# EAGLE board dual-channel-buck-v0 (EAGLE 5.07)
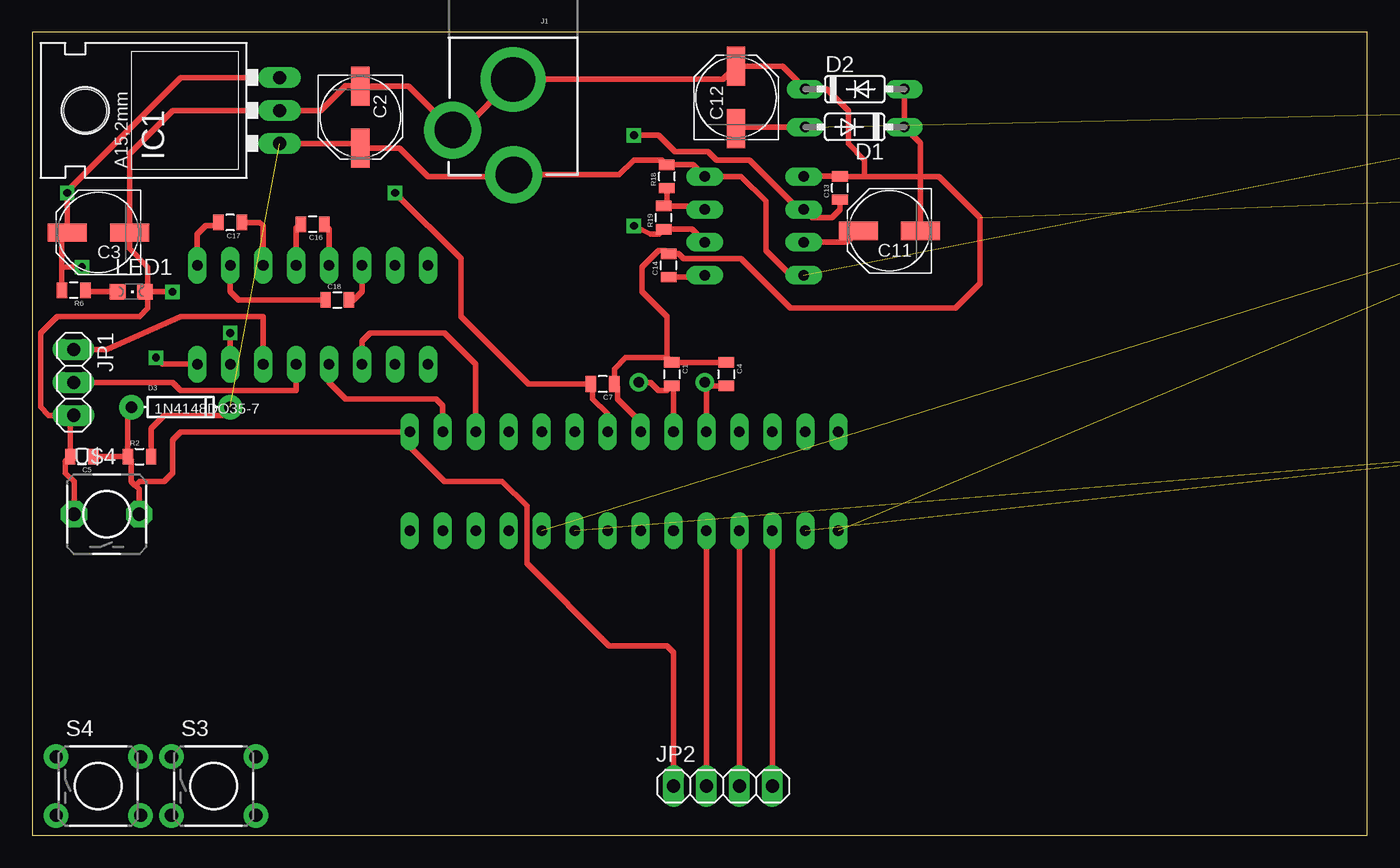
[diagram p0: board, top side]
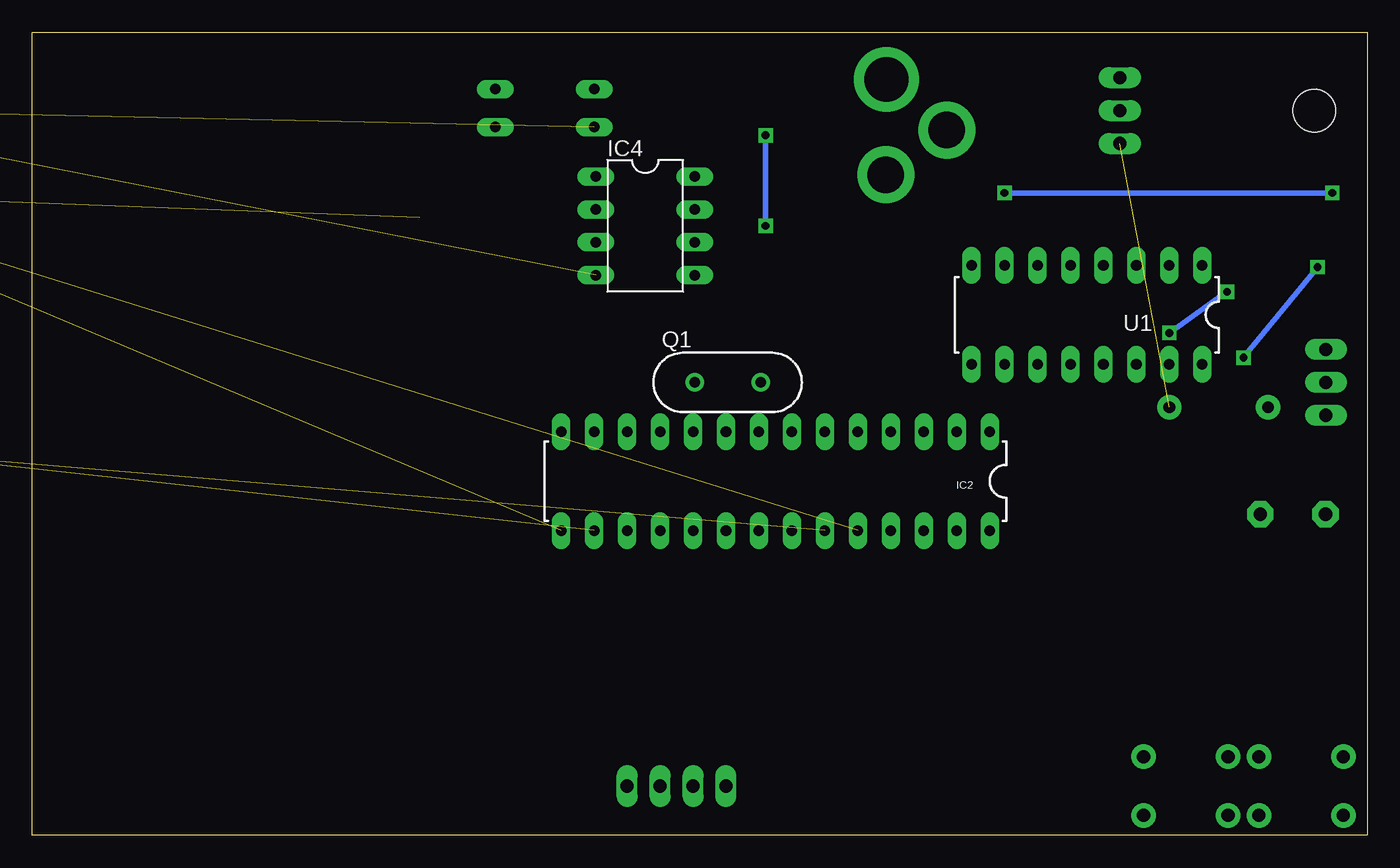
[diagram p1: board, bottom side, seen from below]

Size 102.85 x 61.9 mm. Coordinates in mm from the lower left corner, seen from the top.
Outline: 0,0 102.85,0 102.85,61.9 0,61.9 0,0
Copper layers (1*16): Top 0.035mm / dielectric 1.5mm / Bottom 0.035mm
Design rules "SparkFun-diy": minimum track width 8mil, minimum drill 20mil, track to track 10mil, track to pad 10mil, pad to pad 10mil, via to via 10mil, smd to smd 10mil, copper to edge 10mil, drill to drill 8mil, minimum pad ring 12mil, minimum via ring 10mil, stop-mask expansion 4mil, vias tented up to drill 25mil, thermal gap 10mil

## Footprints (pad centres in the part's own frame; a part is rotated, then mirrored left to right if it is on the bottom)
0805 = smd 0.8 x 1.2: 1 -0.9,0; 2 0.9,0
PANASONIC_D = smd 3 x 1.4: + 2.4,0; - -2.4,0
CPOL-RADIAL-100UF-25V = drill 0.7 pad 1.651 square: 1 1.27,0 | drill 0.7 pad 1.651 round: 2 -1.27,0
DO35-7 = drill 0.813 long: A 3.81,0; C -3.81,0
DIODE-1N4148 = drill 0.9 pad 1.88 round: A -3.81,0; C 3.81,0
DO41-7.6 = drill 1.1 pad 1.7 round: A 3.81,0; C -3.81,0
78XXL = drill 1.016 long: GND 0,-3.81; IN -2.54,-3.81; OUT 2.54,-3.81 | hole 3.302: 0,11.176
DIL28-3 = drill 0.813 long: 1 -16.51,-3.81; 2 -13.97,-3.81; 3 -11.43,-3.81; 4 -8.89,-3.81; 5 -6.35,-3.81; 6 -3.81,-3.81; 7 -1.27,-3.81; 8 1.27,-3.81; 9 3.81,-3.81; 10 6.35,-3.81; 11 8.89,-3.81; 12 11.43,-3.81; 13 13.97,-3.81; 14 16.51,-3.81; 15 16.51,3.81; 16 13.97,3.81; 17 11.43,3.81; 18 8.89,3.81; 19 6.35,3.81; 20 3.81,3.81; 21 1.27,3.81; 22 -1.27,3.81; 23 -3.81,3.81; 24 -6.35,3.81; 25 -8.89,3.81; 26 -11.43,3.81; 27 -13.97,3.81; 28 -16.51,3.81
DIL-08 = drill 0.813 long: 1 -3.81,-3.81; 2 -1.27,-3.81; 3 1.27,-3.81; 4 3.81,-3.81; 5 3.81,3.81; 6 1.27,3.81; 7 -1.27,3.81; 8 -3.81,3.81
DIL08 = drill 0.813 pad 1.27 round: 1 -3.81,-3.81; 2 -1.27,-3.81; 3 1.27,-3.81; 4 3.81,-3.81; 5 3.81,3.81; 6 1.27,3.81; 7 -1.27,3.81; 8 -3.81,3.81
POWER_JACK_2.1X5.5_BIG_PTH = drill 3.4 pad 5 round: GND -0.053,7.35 | drill 2.8 pad 4.4 round: GNDBREAK -4.7,3.451; PWR 0,0
1X03 = drill 1.016 long: 1 -2.54,0; 2 0,0; 3 2.54,0
1X04 = drill 1.016 long: 1 -3.81,0; 2 -1.27,0; 3 1.27,0; 4 3.81,0
ED16 = drill 1.016 long: 1 -8.255,0; 2 -3.81,0
CHIPLED_0805 = smd 1.2 x 1.2: A 0,-1.05; C 0,1.05
2,54/1,1 = drill 1.118 pad 2.54 octagon: 1 0,0
HC49US = drill 0.813 round: 1 -2.54,0; 2 2.54,0
TO220BH = drill 1.118 long: D 0,-6.35; G -2.54,-6.35; S 2.54,-6.35 | hole 3.302: 0,11.176
TO220 = drill 1.118 long: 1 -2.54,-6.35; 2 0,-6.35; 3 2.54,-6.35 | hole 3.302: 0,11.176
AXIAL-0.3 = drill 0.9 pad 1.88 round: P$1 -3.81,0; P$2 3.81,0
0414/15 = drill 1.016 octagon: 1 -7.62,0; 2 7.62,0
TACTILE-PTH = drill 1.016 pad 1.88 round: 1 -3.251,2.261; 2 3.251,2.261; 3 -3.251,-2.261; 4 3.251,-2.261
SOT23-EBC = smd 1 x 1.4: B 0.95,-1.1; C 0,1.1; E -0.95,-1.1
DIL16 = drill 0.813 long: 1 -8.89,-3.81; 2 -6.35,-3.81; 3 -3.81,-3.81; 4 -1.27,-3.81; 5 1.27,-3.81; 6 3.81,-3.81; 7 6.35,-3.81; 8 8.89,-3.81; 9 8.89,3.81; 10 6.35,3.81; 11 3.81,3.81; 12 1.27,3.81; 13 -1.27,3.81; 14 -3.81,3.81; 15 -6.35,3.81; 16 -8.89,3.81
ALPS-SKHV = drill 1.016 pad 2.032 octagon: 2 -2.51,0; 3 2.51,0

## Placement (x,y rotation side)
C1  22  [0805]  49.28,35.56 270 top
C2  100uf  [PANASONIC_D]  25.27,55.37 270 top
C3  10uf  [PANASONIC_D]  5.08,46.48 180 top
C4  22  [0805]  53.47,35.56 270 top
C5  100n  [0805]  3.81,29.21 180 top
C7  0.1  [0805]  43.94,34.8 180 top
C11  100uf  [PANASONIC_D]  66.04,46.61 180 top
C12  100uf  [PANASONIC_D]  54.23,56.9 90 top
C13  0.01  [0805]  62.23,49.91 90 top
C14  0.01  [0805]  49.02,43.94 90 top
C15  470uf  [CPOL-RADIAL-100UF-25V]  182.88,61.59 0 top  (outside the outline)
C16  0.1  [0805]  21.59,47.12 180 top
C17  0.1  [0805]  15.24,47.24 180 top
C18  0.1  [0805]  23.5,41.27 0 top
C19  0.01  [0805]  204.47,37.47 0 top  (outside the outline)
C20  [0805]  201.29,31.75 0 top  (outside the outline)
C21  [0805]  205.1,31.75 0 top  (outside the outline)
C22  [0805]  208.91,31.75 0 top  (outside the outline)
D1  1N4148DO35-7  [DO35-7]  63.37,54.61 180 top
D2  1N4148DO35-7  [DO35-7]  63.37,57.53 0 top
D3  1N4148DO35-7  [DIODE-1N4148]  11.43,33.02 0 top
D5  1N5819-B  [DO41-7.6]  192.41,61.59 0 top  (outside the outline)
D6  1N5819-B  [DO41-7.6]  170.18,51.44 0 top  (outside the outline)
IC1  7805  [78XXL]  15.24,55.88 90 top
IC2  AVR-MEGA8-PPTH  [DIL28-3]  45.59,27.3 180 bottom
IC4  NE555  [DIL-08]  55.63,46.99 270 bottom
IC5  TL062P  [DIL08]  172.72,60.96 0 top  (outside the outline)
J1  POWER_JACKPTH_BIG  [POWER_JACK_2.1X5.5_BIG_PTH]  37.08,50.93 0 top
JP1  [1X03]  3.17,34.92 270 top
JP2  [1X04]  53.21,3.81 0 top
L1  [ED16]  200.03,80.01 0 top  (outside the outline)
LED1  RED  [CHIPLED_0805]  7.62,41.91 270 top
LED2  RED  [CHIPLED_0805]  187.32,43.18 0 top  (outside the outline)
PAD1  [2,54/1,1]  207.01,43.81 0 top  (outside the outline)
PAD2  [2,54/1,1]  167.64,35.56 0 top  (outside the outline)
Q1  [HC49US]  49.28,34.92 0 bottom
Q4  [TO220BH]  184.15,74.93 0 top  (outside the outline)
Q5  IRF540  [TO220]  171.45,74.93 0 top  (outside the outline)
R2  10k  [0805]  8.26,29.21 0 top
R6  680  [0805]  3.17,42.04 180 top
R18  1k  [0805]  48.9,50.8 90 top
R19  75k  [0805]  48.64,47.62 90 top
R20  1k  [0805]  208.28,37.47 0 top  (outside the outline)
R21  6.8  [0805]  167,31.75 0 top  (outside the outline)
R22  10k  [AXIAL-0.3]  177.16,36.83 0 top  (outside the outline)
R23  10k  [AXIAL-0.3]  187.32,36.83 0 top  (outside the outline)
R24  1k  [0805]  170.81,31.75 0 top  (outside the outline)
R25  0.1R  [0414/15]  187.96,50.8 0 top  (outside the outline)
R26  1k  [AXIAL-0.3]  197.49,36.83 0 top  (outside the outline)
R27  1k  [0805]  174.62,31.75 0 top  (outside the outline)
R28  1k  [0805]  178.44,31.75 0 top  (outside the outline)
R29  10k  [0805]  182.25,31.75 0 top  (outside the outline)
R30  1k  [0805]  186.06,31.75 0 top  (outside the outline)
R31  1k  [0805]  189.87,31.75 0 top  (outside the outline)
R32  1k  [0805]  193.68,31.75 0 top  (outside the outline)
R33  10k  [0805]  197.49,31.75 0 top  (outside the outline)
R34  1R/5W  [0414/15]  174.62,41.91 0 top  (outside the outline)
S3  [TACTILE-PTH]  13.97,3.81 0 top
S4  [TACTILE-PTH]  5.08,3.81 0 top
T1  [SOT23-EBC]  193.68,43.18 0 top  (outside the outline)
T2  [SOT23-EBC]  198.12,43.18 0 top  (outside the outline)
T3  [SOT23-EBC]  202.56,43.18 0 top  (outside the outline)
U1  MAX232PTH  [DIL16]  21.59,40.13 180 bottom
U$4  TACT_SWITCH-2-PTH  [ALPS-SKHV]  5.71,24.77 0 top

## Library data of the parts
C1 C2 C4 C7 C11-C22 IC1 IC2 Q1 R6 R18-R24 R26-R33 S3 S4 U1 = SparkFun
C3 C5 D3 J1 L1 LED1 LED2 R2 T1-T3 U$4 = digital-toy
D1 D2 D5 D6 = diode
IC4 = st-microelectronics
IC5 = linear
JP1 JP2 = pinhead
PAD1 PAD2 = wirepad
Q4 = transistor-power
Q5 = transistor-fet
R25 R34 = rcl

## Nets
5V: C3.+ C7.2 IC1.OUT IC2.7 R6.2 U1.16
-VCC: C12.- D1.A IC5.4
CUR: C20.1 IC5.3 PAD2.1 R25.2
GND: C1.1 C2.- C3.- C4.1 C5.2 C7.1 C12.+ C13.2 C14.2 C15.2 C19.2 C20.2 C21.2 C22.2 D2.C D6.A IC1.GND IC2.8 IC4.1 J1.GND J1.GNDBREAK JP1.3 LED1.C Q5.3 R20.1 R23.P$1 R25.1 R27.2 R30.2 R31.2 R33.1 T2.C T3.E U1.15 U$4.2
I_ADC: C22.1 IC2.23 R26.P$2
MISO: IC2.18 JP2.3
MOSI: IC2.17 JP2.4
N$2: C1.2 IC2.9 Q1.2
N$3: C4.2 IC2.10 Q1.1
N$10: LED1.A R6.1
N$11: IC4.7 R18.1 R19.2
N$12: C13.1 IC4.2 IC4.6 R19.1
N$13: R22.P$1 R23.P$2 T3.B
N$14: C14.1 IC4.5
N$19: C11.+ IC4.3
N$23: C11.- D1.C D2.A
N$24: C17.2 U1.1
N$25: C17.1 U1.3
N$26: R24.1 T1.B T2.B T3.C
N$27: R21.2 T1.E T2.E
N$28: C16.2 U1.4
N$29: C16.1 U1.5
N$30: C18.1 U1.2
N$31: C18.2 U1.6
N$32: JP1.1 U1.14
N$33: JP1.2 U1.13
N$34: LED2.C R20.2
N$35: Q4.G R21.1
N$36: C15.1 C19.1 D5.A L1.1 LED2.A
N$37: D6.C L1.2 Q4.D
N$38: D5.C PAD1.1 R29.2 R34.1
N$39: IC5.2 R27.1 R28.1
N$40: IC5.1 R26.P$1 R28.2
N$41: IC5.6 R30.1 R32.2
N$42: Q5.2 R34.2
PWM: IC2.16 R22.P$2
PWM_DIS: IC2.15 Q5.1 R33.2
RS232_RX: IC2.2 U1.12
RS232_TX: IC2.3 U1.11
RST: C5.1 D3.A IC2.1 JP2.1 R2.1 U$4.3
SCK: IC2.19 JP2.2
V_ADC: IC2.24 IC5.7 R32.1
VCC: C2.+ D3.C IC1.IN IC4.4 IC4.8 IC5.8 J1.PWR Q4.S R2.2 R18.2 R24.2 T1.C
VOLTAGE: C21.1 IC5.5 R29.1 R31.1

## Tracks (layer width: path | path; a pad name or v marks a point on that pad's centre or on a via)
5V  (via drill 0.6)
  Top 0.406: IC1.OUT 11.43,58.42 2.68,49.67 v2.68,49.53 C3.+ 2.27,46.08 2.27,43.81 | R6.2 2.27,43.81 | IC2.7 44.32,32.51 43.18,33.66 43.18,34.66 C7.2 38.23,34.8 33.02,40.01 33.02,44.45 v27.94,49.53 | U1.16 10.03,36.32 v9.53,36.83 | 2.27,43.81 v3.81,43.81
  Bottom 0.406: v3.81,43.81 v9.53,36.83 | v2.68,49.53 v27.94,49.53
-VCC  (1 unrouted)
  Top 0.406: D1.A 54.34,54.61 C12.-
CUR  (3 unrouted)
GND  (via drill 0.6)  (16 unrouted)
  Top 0.406: LED1.C 8.89,42.13 8.89,43.81 7.48,45.23 C3.- 7.48,52.56 10.79,55.88 IC1.GND 22.23,55.88 24.13,57.78 25.26,57.78 C2.- 28.99,57.77 J1.GNDBREAK 33.13,54.38 J1.GND 53.21,58.28 C12.+ 57.8,59.3 D2.C 61.21,57.53 62.87,55.88 62.87,53.34 64.14,52.07 64.14,50.8 | U$4.2 3.21,27.27 2.54,27.94 2.54,28.84 C5.2 2.91,32.12 JP1.3 1.27,32.38 0.64,33.02 0.64,38.73 1.91,40.01 8.26,40.01 8.89,40.64 8.89,41.69 LED1.C | IC2.8 46.86,31.88 45.09,33.66 45.09,34.55 C7.1 44.84,35.95 45.72,36.83 48.91,36.83 | 48.91,36.83 C1.1 C4.1 | 48.91,36.83 48.91,39.99 46.99,41.91 46.99,43.81 48.26,45.09 48.78,45.09 C14.2 49.77,44.84 50.16,44.45 54.61,44.45 58.42,40.64 71.12,40.64 73.03,42.55 73.03,47.62 69.85,50.8 64.14,50.8 | 64.14,50.8 C13.2 IC4.1 | v15.24,38.73 U1.15 | LED1.C v10.79,41.91
  Bottom 0.406: v10.79,41.91 v15.24,38.73
I_ADC  (2 unrouted)
MISO
  Top 0.406: JP2.3 IC2.18
MOSI
  Top 0.406: JP2.4 IC2.17
N$2
  Top 0.406: IC2.9 49.4,34.53 C1.2 48.91,34.29 48.26,34.29 47.62,34.92 Q1.2
N$3
  Top 0.406: IC2.10 51.94,34.8 Q1.1 52.08,34.66 C4.2
N$10
  Top 0.406: LED1.A 4.2,41.91 R6.1
N$11
  Top 0.406: R18.1 48.9,48.78 R19.2 51.55,48.52 IC4.7
N$12  (via drill 0.6)
  Top 0.406: IC4.6 50.81,46.73 R19.1 48.27,46.35 47.62,46.35 v46.35,46.99 | C13.1 62.23,48.26 61.59,47.62 60.07,47.62 IC4.2 59.05,48.26 55.24,52.07 52.7,52.07 52.07,52.7 49.53,52.7 48.26,53.98 v46.35,53.98
  Bottom 0.406: v46.35,46.99 v46.35,53.98
N$13  (2 unrouted)
N$14
  Top 0.406: C14.1 51.68,43.04 IC4.5
N$19
  Top 0.406: IC4.3 62.75,45.72 C11.+
N$23
  Top 0.406: C11.- 68.44,53.35 67.56,54.23 D1.C D2.A
N$24
  Top 0.406: U1.1 12.7,46.35 13.34,46.99 14.09,46.99 C17.2
N$25
  Top 0.406: C17.1 17.53,47.24 17.78,46.99 U1.3
N$26  (3 unrouted)
N$27  (2 unrouted)
N$28
  Top 0.406: U1.4 20.32,46.85 C16.2
N$29
  Top 0.406: U1.5 22.86,46.75 C16.1
N$30
  Top 0.406: C18.1 15.88,41.27 15.24,41.91 U1.2
N$31
  Top 0.406: C18.2 24.77,41.27 25.4,41.91 U1.6
N$32
  Top 0.406: JP1.1 5.71,37.47 11.43,40.01 17.78,40.01 U1.14
N$33
  Top 0.406: JP1.2 10.79,34.92 11.43,34.29 20.32,34.29 U1.13
N$34  (1 unrouted)
N$35  (1 unrouted)
N$36  (4 unrouted)
N$37  (2 unrouted)
N$38  (3 unrouted)
N$39  (2 unrouted)
N$40  (2 unrouted)
N$41  (2 unrouted)
N$42  (1 unrouted)
PWM  (1 unrouted)
PWM_DIS  (2 unrouted)
RS232_RX
  Top 0.406: IC2.2 31.62,33.15 31.11,33.66 24.13,33.66 22.86,34.92 U1.12
RS232_TX
  Top 0.406: IC2.3 34.16,36.32 31.75,38.73 26.04,38.73 25.4,38.1 U1.11
RST
  Top 0.406: U$4.3 8.22,26.7 7.94,26.99 | 7.94,26.99 7.62,27.3 7.62,28.95 R2.1 | R2.1 C5.1 | R2.1 7.36,32.76 D3.A | 7.94,26.99 8.26,27.3 10.16,27.3 10.79,27.94 10.79,30.48 11.43,31.11 IC2.1 29.21,30.99 29.21,29.84 31.75,27.3 36.2,27.3 38.1,25.4 38.1,20.95 44.45,14.61 48.9,14.61 49.4,14.1 JP2.1
SCK
  Top 0.406: JP2.2 IC2.19
V_ADC  (2 unrouted)
VCC  (5 unrouted)
  Top 0.406: IC1.IN 24.91,53.34 C2.+ 28.31,52.97 30.48,50.8 36.96,50.8 J1.PWR 45.21,50.93 46.35,52.07 48.52,52.07 R18.2 50.92,51.7 IC4.8 54.61,50.8 56.52,48.9 56.52,45.09 58.42,43.18 IC4.4 | R2.2 9.15,31.38 10.16,32.38 14.61,32.38 D3.C
VOLTAGE  (3 unrouted)